# Altium PCB PCB_Amp_Valvulado 2.0.PcbDoc
Units mm, origin at the board's own origin, x right, y up, seen from the top; angles counter-clockwise.
Board outline 136 x 75 mm, 2 copper layers (Top Layer, Bottom Layer); 22 components, 36 nets, 60 pads, 0 vias.
Unrouted connection lines stored in the file: 41.
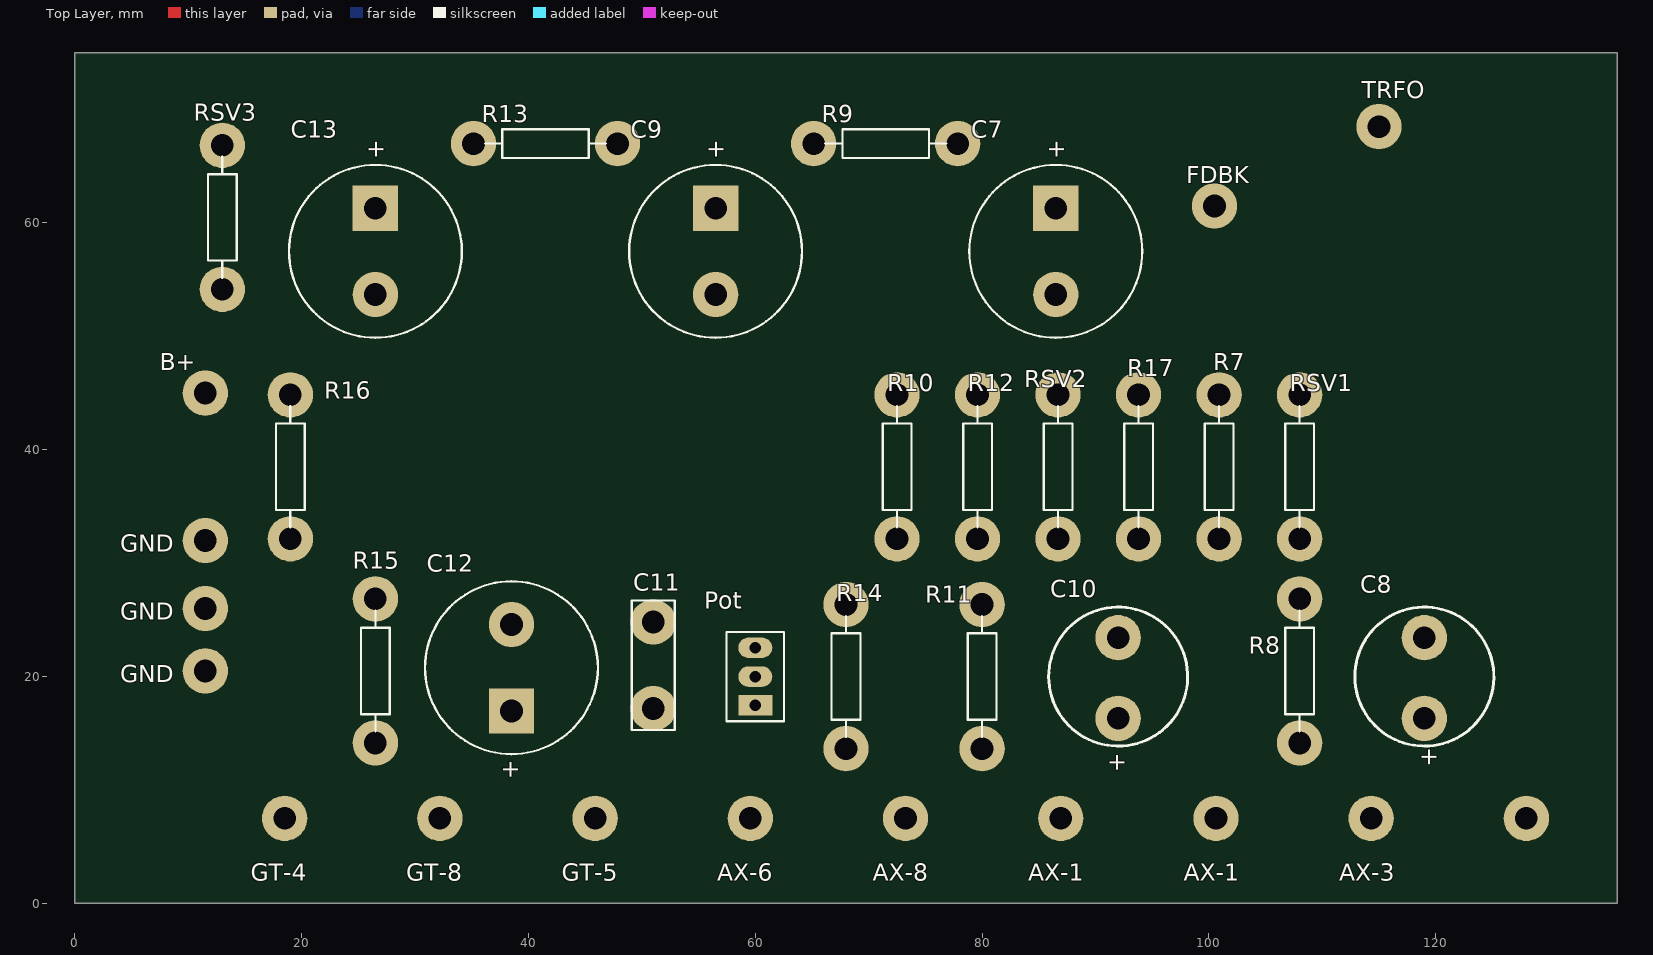
[diagram p0: Top Layer view]
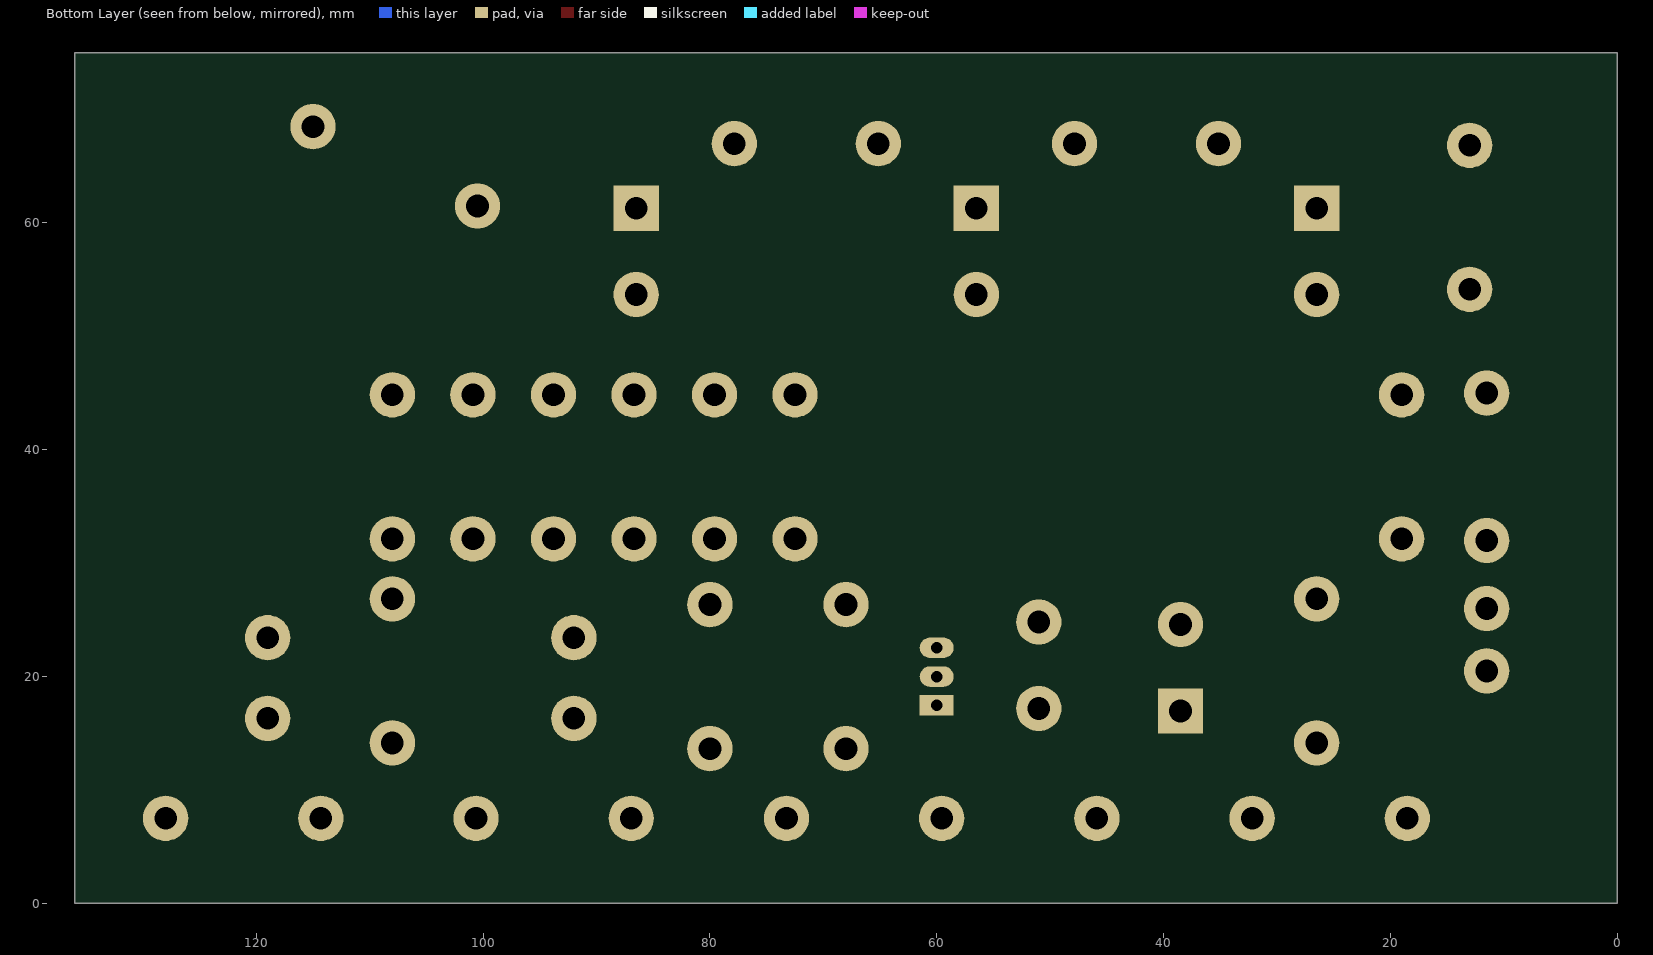
[diagram p1: Bottom Layer view, seen from below]

## Layer stack, top to bottom
Top Solder: solder mask 0.0102, Solder Resist, Dk 3.5
Top Layer: signal copper 0.0356
Dielectric 1: dielectric 0.32, FR-4, Dk 4.8
Bottom Layer: signal copper 0.0356
Bottom Solder: solder mask 0.0102, Solder Resist, Dk 3.5

## Board outline
0,0 0,75 135,75 136,75 136,0

## Design rules (kind name [scope] priority, off if disabled: settings)
Clearance Clearance_POT [All vs InComponent('POT')] p1: gap=0.254
Clearance [All] p2: gap=3
HoleSize [All] p1: absolutevalues=TRUE maxlimit=3 minlimit=1 maxpercent=80.000 minpercent=20.000
PlaneConnect [All] p1: planeconnectstyle=Direct reliefexpansion=0.508 reliefentries=4 reliefconductorwidth=0.254 reliefairgap=0.254
PolygonConnect [All] p1: connectstyle=Direct reliefconductorwidth=0.254 reliefentries=4 polygonreliefangle="90 Angle" airgapwidth=0.254
RoutingVias [All] p1: holewidth=1 width=3 viastyle="Through Hole" minholewidth=1 minwidth=3 maxholewidth=3 maxwidth=6
SolderMaskExpansion [All] p1: expansion=0.102
Width [All] p1: maxlimit=3 minlimit=0.6 preferedwidth=2
28 further rules are at their usual default settings.

## Classes and differential pairs
component class "Shem_Supply_Valvulado 2.0": C1 C2 C3 C4 C5 D1 D2 D5 D6 F1 F2 J1 R1 R2 R3 S1 S2 T1 V1-H V2-H

## Components (designator, comment, footprint, x,y, rotation, side; value= is the part's Value field where it differs from the comment)
C7 "450V" CAP7.6-15 86.5,57.5 r90 top
C8 "25V" "CAP POL.254" 119,20 r270 top
C9 "450V" CAP7.6-15 56.5,57.5 r90 top
C10 "25V" "CAP Pol.254" 92,20 r270 top
C11 "Cap" RAD-0.3 51,21 r270 top
C12 "450V" CAP7.6-15 38.5,20.781 r270 top
C13 "450V" CAP7.6-15 26.5,57.5 r90 top
Pot "Pot" "Header 3-pin" 60,20 r90 top
R7 "Res" AXIAL-0.5 100.9,38.5 r90 top
R8 "Res" AXIAL-0.5 108,20.5 r270 top
R9 "Res" AXIAL-0.5 71.5,67 r0 top
R10 "Res" AXIAL-0.5 72.5,38.5 r90 top
R11 "Res" AXIAL-0.5 80,20 r270 top
R12 "Res" AXIAL-0.5 79.6,38.5 r270 top
R13 "Res" AXIAL-0.5 41.5,67 r0 top
R14 "Res" AXIAL-0.5 68,20 r90 top
R15 "Res" AXIAL-0.5 26.5,20.5 r270 top
R16 "Res" AXIAL-0.5 19,38.5 r270 top
R17 "Res" AXIAL-0.5 93.8,38.5 r90 top
RSV1 "Res" AXIAL-0.5 108,38.5 r270 top
RSV2 "Res" AXIAL-0.5 86.7,38.5 r270 top
RSV3 "Res" AXIAL-0.5 13,60.5 r90 top

## Footprints (in the part's own frame and the unit in brackets; to place one, negate y for a bottom-side part, rotate by r counter-clockwise, add the part's x,y. Pads: shape width x height; smd on the part's side, far side on the other; paste and mask are expansions set on the pad)
AXIAL-0.5 [mm] "Axial Device, Thru-Hole; 2 Leads; 0.5 in Pin Spacing"
  round 4 hole 2: 1(-6.35,0) 2(6.35,0)
  silkscreen extent -5.33,-1.27 5.33,1.27, body extent -6.72,-1.87 6.73,1.88, height 5.38
CAP7.6-15 [mm] "Polarized Capacitor (Radial); 2 Leads"
  rect 4x4 hole 2: 1(3.81,0)
  round 4 hole 2: 2(-3.81,0)
  silkscreen extent -7.62,-7.62 7.62,7.62, body extent -8,-8 8,8, height 25.8
"CAP POL.254" [mm]
  round 4 hole 2: 0(-3.429,0) 1(3.683,0)
  silkscreen extent -6.13,-6.13 6.13,6.13, body extent -2.5,-2.5 2.5,2.5, height 11
"CAP Pol.254" [mm]
  round 4 hole 2: 0(-3.429,0) 1(3.683,0)
  silkscreen extent -6.13,-6.13 6.13,6.13, body extent -2.5,-2.5 2.5,2.5, height 11
"Header 3-pin" [mm] "Thru-Hole; 3 Leads"
  rect 1.8x3 hole 1: 1(-2.54,0)
  oval 1.8x3 hole 1: 2(0,0) 3(2.54,0)
  silkscreen extent -3.94,-2.54 3.94,2.54, body extent -3.81,-3.18 3.81,3.18, height 10.99
RAD-0.3 [mm] "Radial Cap, Thru-Hole; 2 Leads; 0.3 in Pin Spacing"
  round 4 hole 2: 1(-3.81,0) 2(3.81,0)
  silkscreen extent -5.71,-1.91 5.71,1.91

## Part data
C7 C8 C9 C10 C12 C13: library part "Cap Pol1", "Polarized Capacitor (Radial)"
C11: "Capacitor"
Pot: "Potentiometer"
R7 R8 R9 R10 R11 R12 R13 R14 R15 R16 R17 RSV1 RSV2 RSV3: "Resistor"

## Free pads (board coordinates)
  round 4 hole 2: 0(86.937,7.5) 1(59.562,7.5) 3(45.875,7.5) 4(18.5,7.5) 5(73.25,7.5) 6(114.312,7.5) 7(32.187,7.5) 8(11.5,45) 9(100.5,61.5) 10(11.5,20.5) 10(11.5,26) 10(11.5,32) 11(100.625,7.5) 12(128,7.5) 13(115,68.5)

## Nets (pads, with @x,y where several pads share a name; then routed paths per layer and width w, separated by ;. In a path a pad name is that pad's centre, name@x,y a point inside that pad or via, vN(x,y) a via of type N, cw(c..) or ccw(c..) an arc to the next point about the centre after c; other vN are vias at no path point)
B+: pad.8 RSV3.1
GND: C7.2 C9.2 C12.2 C13.2 pad.10 pad.12 Pot.3 R12.1 R15.1 RSV1.1 RSV2.1
NetC1_1: 
NetC1_2: 
NetC2_1: 
NetC2_2: 
NetC7_1: C7.1 R7.2 R9.2
NetC8_1: C8.1 pad.6 R8.2
NetC8_2: R8.1 RSV1.2
NetC9_1: C9.1 R9.1 R10.2 R13.2
NetC10_1: C10.1 pad.5 R11.2
NetC10_2: R11.1 R12.2 R17.1 RSV2.2
NetC11_1: C11.1 pad.1 R10.1
NetC11_2: C11.2 Pot.1
NetC12_1: C12.1 pad.7 R15.2
NetC13_1: C13.1 pad.13 R13.1 R16.1 RSV3.2
NetD5_1: 
NetD5_2: 
NetF1_1: 
NetF2_1: 
NetJ1_1: 
NetJ1_2: 
NetJ1_5: 
NetJ3_1: pad.9 R17.2
NetJ3_5: 
NetPot_2: Pot.2 R14.2
NetR1_2: 
NetR5_1: 
NetR7_1: pad.0 pad.11 R7.1
NetR14_1: pad.3 R14.1
NetR16_2: pad.4 R16.2
NetS2_1: 
NetS2_3: 
NetS3_1: 
NetS3_3: 
NetT2_2: 
pads on no net: C8.0 C10.0

## Silkscreen, mask and mechanical layers (free items; w line width, h text height)
Top Overlay:
  text "TRFO" at 113.5,71 h1.52
  text "FDBK" at 98,63.5 h1.52
  text "B+" at 7.5,47 h1.52
  text "GND" at 4,31 h1.52
  text "GND" at 4,25 h1.52
  text "GND" at 4,19.5 h1.52
  text "GT-4" at 15.5,2 h1.52
  text "GT-8" at 29.214,2 h1.52
  text "GT-5" at 42.929,2 h1.52
  text "AX-6" at 56.643,2 h1.52
  text "AX-8" at 70.357,2 h1.52
  text "AX-1" at 84.071,2 h1.52
  text "AX-1" at 97.786,2 h1.52
  text "AX-3" at 111.5,2 h1.52
Drill Drawing:
  lines w0.254: 169.307,4.5 170.153,4.923 171,4.5 170.577,5.347 171,6.193 170.153,5.77 169.307,6.193 169.73,5.347 169.307,4.5 ; 169.307,8.31 171,8.31 171,10.003 169.307,10.003 169.307,8.31
  lines w0.381: 167.788,3.357 256.563,3.357 ; 167.788,10.977 256.563,10.977 ; 181.78,-0.453 181.78,14.787 ; 195.493,-0.453 195.493,14.787 ; 223.932,-0.453 223.932,14.787 ; 236.782,-0.453 236.782,14.787 ; 167.788,-0.453 256.563,-0.453 256.563,14.787 167.788,14.787 167.788,-0.453
  text "Symbol" at 170.074,12.12 h1.83
  text "Count" at 182.923,12.12 h1.83
  text "Hole Size" at 196.636,12.12 h1.83
  text "Plated" at 225.075,12.12 h1.83
  text "Hole Type" at 237.925,12.12 h1.83
  text "3" at 182.923,8.31 h1.52
  text "1,000mm (39,37mil)" at 196.636,8.31 h1.52
  text "PTH" at 225.075,8.31 h1.52
  text "Round" at 237.925,8.31 h1.52
  text "57" at 182.923,4.5 h1.52
  text "2,000mm (78,74mil)" at 196.636,4.5 h1.52
  text "PTH" at 225.075,4.5 h1.52
  text "Round" at 237.925,4.5 h1.52
  text "60 Total" at 182.923,0.69 h1.52

## Text inside footprints (layer, text, board x,y; h text height)
C7: Top Overlay "+" at 87.237,65.632 h1.5 r90
C8: Top Overlay "+" at 118.771,13.773 h1.5 r270
C9: Top Overlay "+" at 57.237,65.632 h1.5 r90
C10: Top Overlay "+" at 91.238,13.269 h1.5 r270
C12: Top Overlay "+" at 37.763,12.649 h1.5 r270
C13: Top Overlay "+" at 27.237,65.632 h1.5 r90